# Altium PCB hat_template 2023.PcbDoc (part 2 of 2)
Units mm, origin at the board's own origin, x right, y up, seen from the top; angles counter-clockwise.
Board outline 64 x 85 mm, 4 copper layers (Top Layer, Ground Plane, Power Plane, Bottom Layer), stack 0.844 mm thick; 119 components, 62 nets, 322 pads, 111 vias.
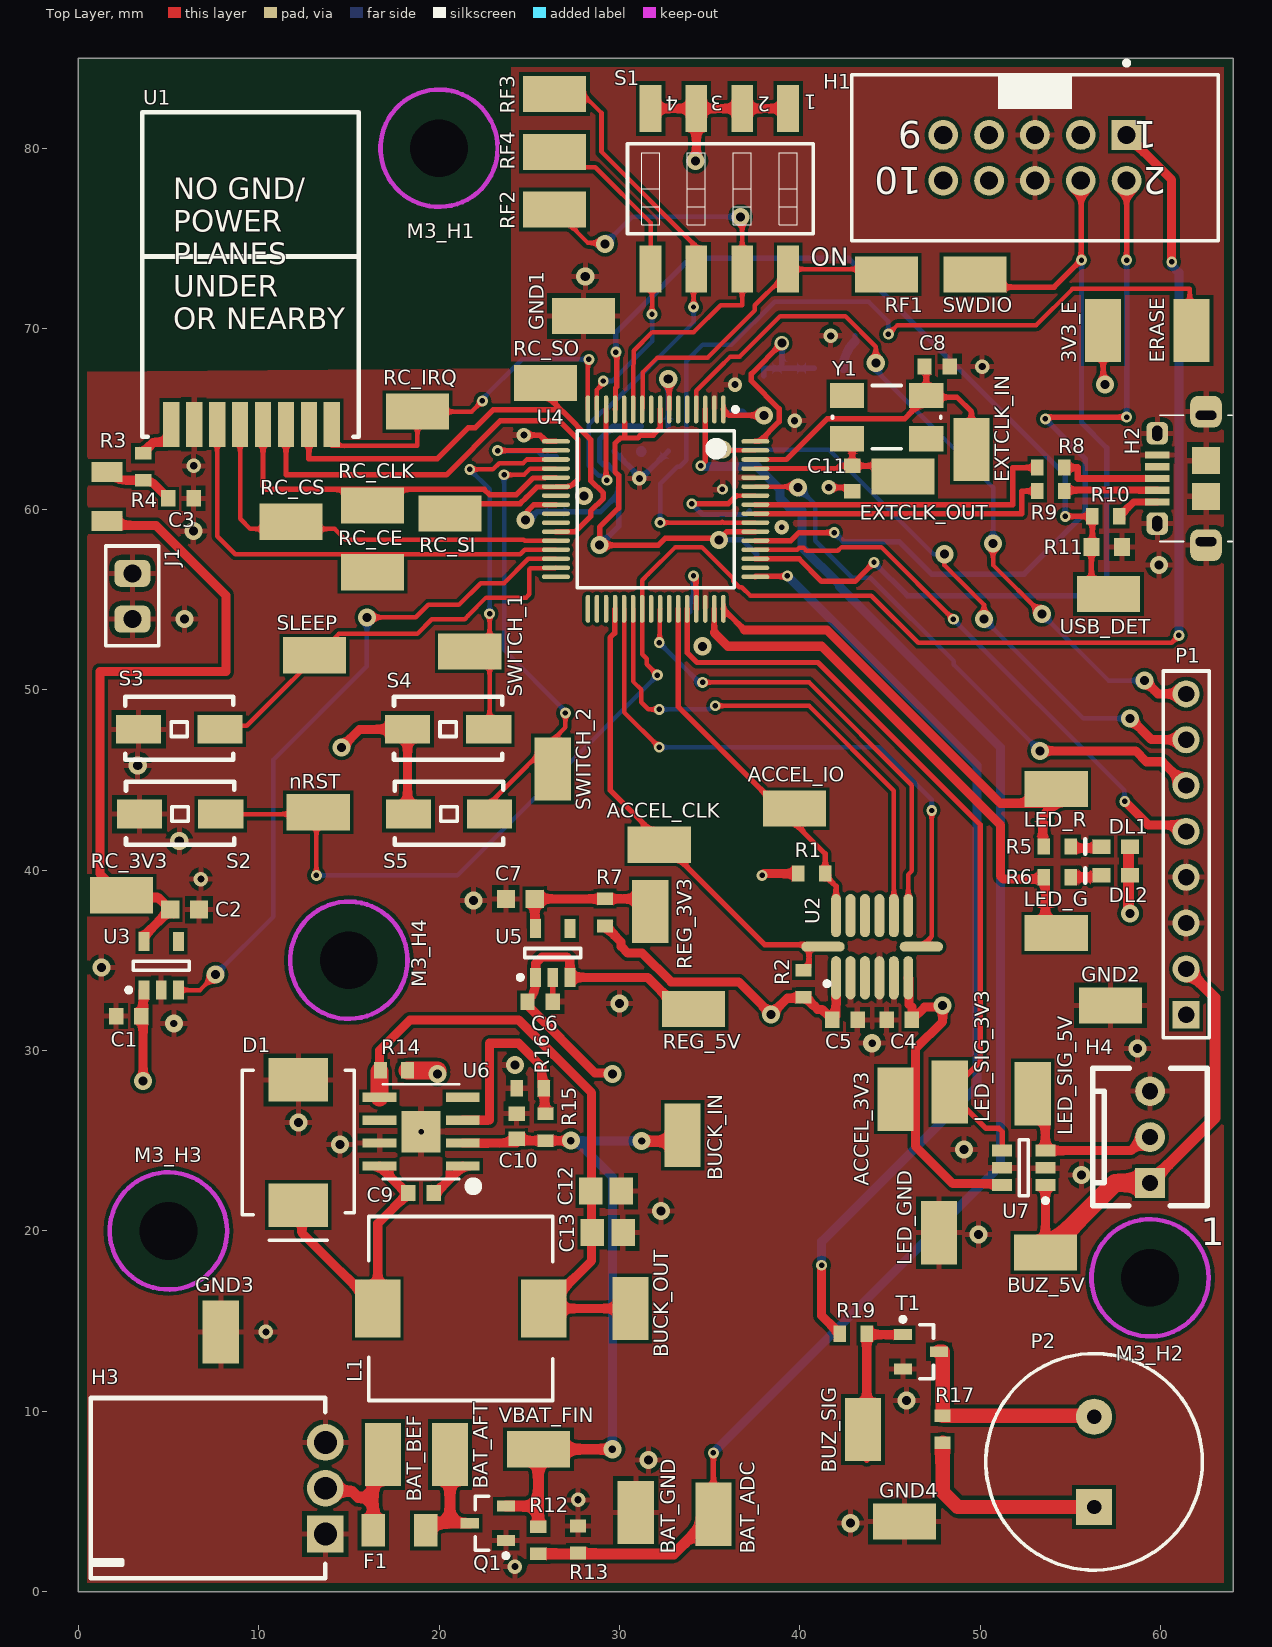
[diagram p0: Top Layer view]

## Via types
v1: diameter 1, hole 0.5, Top Layer to Bottom Layer, 50 vias
v2: diameter 0.6, hole 0.3, Top Layer to Bottom Layer, 42 vias
v3: diameter 0.8, hole 0.4, Top Layer to Bottom Layer, 12 vias
v4: diameter 1, hole 0.4, Top Layer to Bottom Layer, 5 vias
v5: diameter 0.8, hole 0.3, Top Layer to Bottom Layer, 1 vias
v6: diameter 0.8, hole 0.5, Top Layer to Bottom Layer, 1 vias

## Nets (pads, with @x,y where several pads share a name; then routed paths per layer and width w, separated by ;. In a path a pad name is that pad's centre, name@x,y a point inside that pad or via, vN(x,y) a via of type N, cw(c..) or ccw(c..) an arc to the next point about the centre after c; other vN are vias at no path point) (continued)
RADIO_V_EN: (continued)
  Bottom Layer w0.25: v1(7.6,34.2) 10.8,37.4 10.8,46.1 16,51.3 v1(16,54)
SLEEP: S3.2 SLEEP.1 U4.31 | length 23.2
  Top Layer w0.25: S3.2@7.8,47.8 8,48 9.35,48 14.45,53.1 18.8,53.1 19.6,53.9 21.424,53.9 21.6,54.076 21.6,54.1 22.6,55.1 24.824,55.1 25,55.276 25,56.664 25.061,56.725 26.45,56.725 U4.31
SWCLK: H1.2 U4.53 | length 44.6
  Top Layer w0.3: U4.53 39.501,58.25 39.951,58.7 v2(41.9,58.7) ; v2(53.6,65) 53.7,65.1 v2(58.1,65.1) ; v2(58.1,73.8) H1.2
  Bottom Layer w0.3: v2(41.9,58.7) 42.4,58.2 45.498,58.2 47.298,56.4 52.419,56.4 55.8,59.781 55.8,62.8 v2(53.6,65) ; v2(58.1,65.1) v2(58.1,73.8)
SWDIO: H1.4 SWDIO.1 U4.51 | length 51.3
  Top Layer w0.3: U4.51 39.95,57.25 41.2,56 43.05,56 v2(44.1,57.05) ; SWDIO.1@49.7,72.3 54.08,72.3 55.58,73.8 55.58,78.18 H1.4
  Bottom Layer w0.3: v2(44.1,57.05) 45.95,55.2 57,55.2 57,63.4 55.6,64.8 v2(55.6,73.8)
TAPE_SIG_3V3: LED_SIG_3V3.1 U4.44 U7.4 | length 43
  Top Layer w0.3: U4.44 33.75,53.85 33.75,52.048 34.298,51.5 41,51.5 50,42.5 50,29.4 LED_SIG_3V3.1 50.314,25.686 51.014,25.686 51.2,25.5 U7.4
TAPE_SIG_5V: H4.2 LED_SIG_5V.1 U7.3 | length 9.6
  Top Layer w0.3: LED_SIG_5V.1 LED_SIG_5V.1@53.6,26.9
  Top Layer w0.5: LED_SIG_5V.1@53.6,26.9 U7.3 58.346,24.45 59.096,25.2 H4.2
USB_DETECT: R10.2 R11.2 U4.13 USB_DET.1 | length 44.4
  Top Layer w0.3: U4.13 29.775,65.55 29.775,66.714 29.85,66.789 29.85,68.65 v2(29.8,68.7) ; v2(54.7,59.6) R10.2 56.2,57.95 R11.2 56.15,56.25 USB_DET.1
  Bottom Layer w0.3: v2(29.8,68.7) 29.8,69.8 33.9,73.9 42.7,73.9 54.7,61.9 v2(54.7,59.6)
VBAT: BUCK_IN.1 C10.2 Q1.2 R12.2 R15.2 U6.2 VBAT_FIN.1 | length 40.9
  Top Layer w0.5: U6.2 24.3,24.865 C10.2@24.3,25 ; C10.2 C10.2@24.3,25 ; v4(27.3,25) R15.2 C10.2@24.3,25
  Top Layer w0.6: Q1.2 25.5,4.75 ; R12.2 25.5,4.75 ; v4(29.6,7.9) VBAT_FIN.1 25.5,4.75 ; v4(31.225,24.975) 33.5,24.975 BUCK_IN.1
  Bottom Layer w0.5: v4(27.3,25) 27.312,24.988 v4@27.613,24.988 ; v4(29.6,7.9) 29.6,23 v4@27.613,24.988 ; v4(31.225,24.975) 31.213,24.988 v4@27.613,24.988
VBAT_IN: BAT_AFT.1 F1.2 Q1.3 | length 6.8
  Top Layer w0.6: F1.2 19.25,3.75 19.3,3.8 20.6,3.8 ; BAT_AFT.1@20.4,7.6 BAT_AFT.1 20.6,3.8 ; Q1.3 20.6,3.8
VBUS: H2.1 R10.1 | length 2.4
  Top Layer w0.4: R10.1 58.5,60.4 H2.1
pads on no net: H1.3 H1.9 H1.10 H2.4 M3_H1.1 M3_H2.1 M3_H3.1 M3_H4.1 U2.3 U2.10 U2.11 U2.12 U3.4 U4.5 U4.6 U4.9 U4.23 U4.25 U4.26 U4.32 U4.33 U4.34 U4.35 U4.40 U4.42 U4.50 U5.4 U6.4 U6.6 Y1.2 Y1.4

## Polygon pours and split planes (outlines as drawn)
GND on Top Layer "Top Layer-GND" (solid, remove dead copper, pour order 0): 0,85 0,0 64,0 64,85
GND on Bottom Layer "Bottom Layer-GND" (solid, remove dead copper, pour order 2): 0,85 0,0 64,0 64,85
GND on Ground Plane (split plane): 63.49,0.51 0.51,0.51 0.51,67.571 24.1,67.571 24.15,67.58 24.192,67.608 24.22,67.65 24.229,67.7 24.229,84.49 63.49,84.49
3V3 on Power Plane (split plane): 63.49,31.029 0.51,31.029 0.51,67.571 24.1,67.571 24.15,67.58 24.192,67.608 24.22,67.65 24.229,67.7 24.229,84.49 63.49,84.49
5V on Power Plane (split plane): 63.49,0.51 0.51,0.51 0.51,29.771 63.49,29.771

## Other copper
Top Layer:
  pour cut-out: 24,67.8 24,85 0,85 0,67.6
Bottom Layer:
  pour cut-out: 24,67.8 24,85 0,85 0,67.6
Ground Plane (plane layer: these items are gaps in the copper):
  pour cut-out: 23.971,67.829 23.971,85.1 0,85.1 0,67.7
  lines w0.254: 0,85.1 0,67.7 24.1,67.7 24.1,85.1
Power Plane (plane layer: these items are gaps in the copper):
  pour cut-out: 64,30.9 0,30.9 0,29.9 64,29.9
  region: 0,30.9 64,30.9 0,30.9
  pour cut-out: 0,85 0,67.7 24.1,67.7 24.1,85
  lines w0.254: 0,67.7 24.1,67.7 24.1,85 0,85 ; 0,29.9 64,29.9 64,30.9 0,30.9 0,29.9

## Silkscreen, mask and mechanical layers (free items; w line width, h text height)
Board Outline:
  the board outline again, w0.254

## Dimensions
0,85 to 0,0 on Mechanical 1
64,86 to 0,86 on Mechanical 1

## Text inside footprints (layer, text, board x,y; h text height)
H1: Top Overlay "9" at 46.74,81.49 h1.5 r180; Top Overlay "10" at 46.74,78.95 h1.5 r180; Top Overlay "1" at 59.8,81.49 h1.5 r180; Top Overlay "2" at 60.3,78.95 h1.5 r180
H2: Mechanical 1 "PCB Edge" at 64.77,59.55 h0.52 r90
H4: Top Overlay "1" at 62.2,19.2 h1.52
S1: Top Overlay "ON" at 40.6,73.5 h1; Top Overlay "1" at 40.94,82.95 h0.8 r180; Top Overlay "2" at 38.34,82.85 h0.8 r180; Top Overlay "3" at 35.74,82.9 h0.8 r180; Top Overlay "4" at 33.265,82.875 h0.8 r180
U1: Top Overlay "NO GND/ / POWER / PLANES / UNDER / OR NEARBY" at 5.257,69.975 h1.2
U6: Mechanical 13 "*" at 20.93,24.344 h1.27 r180